# EAGLE board RPinstrumentationAmp1.1_v9 (EAGLE 9.7.0)
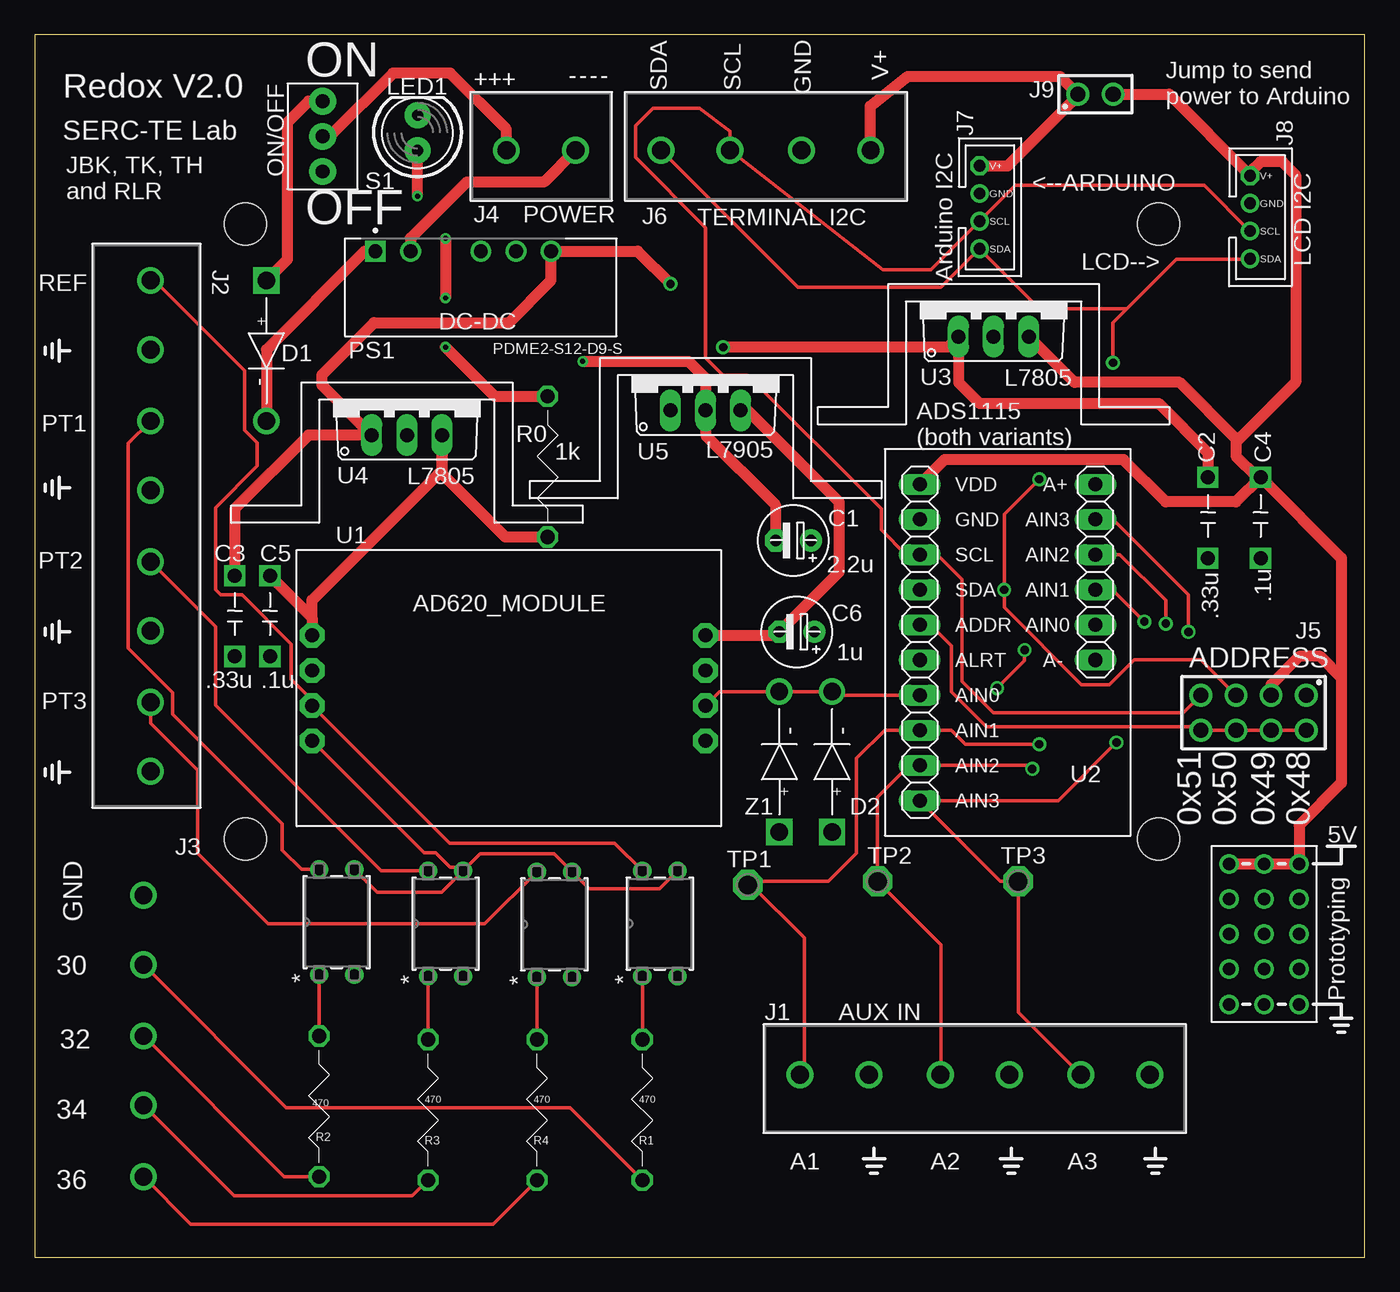
[diagram p0: board, top side]
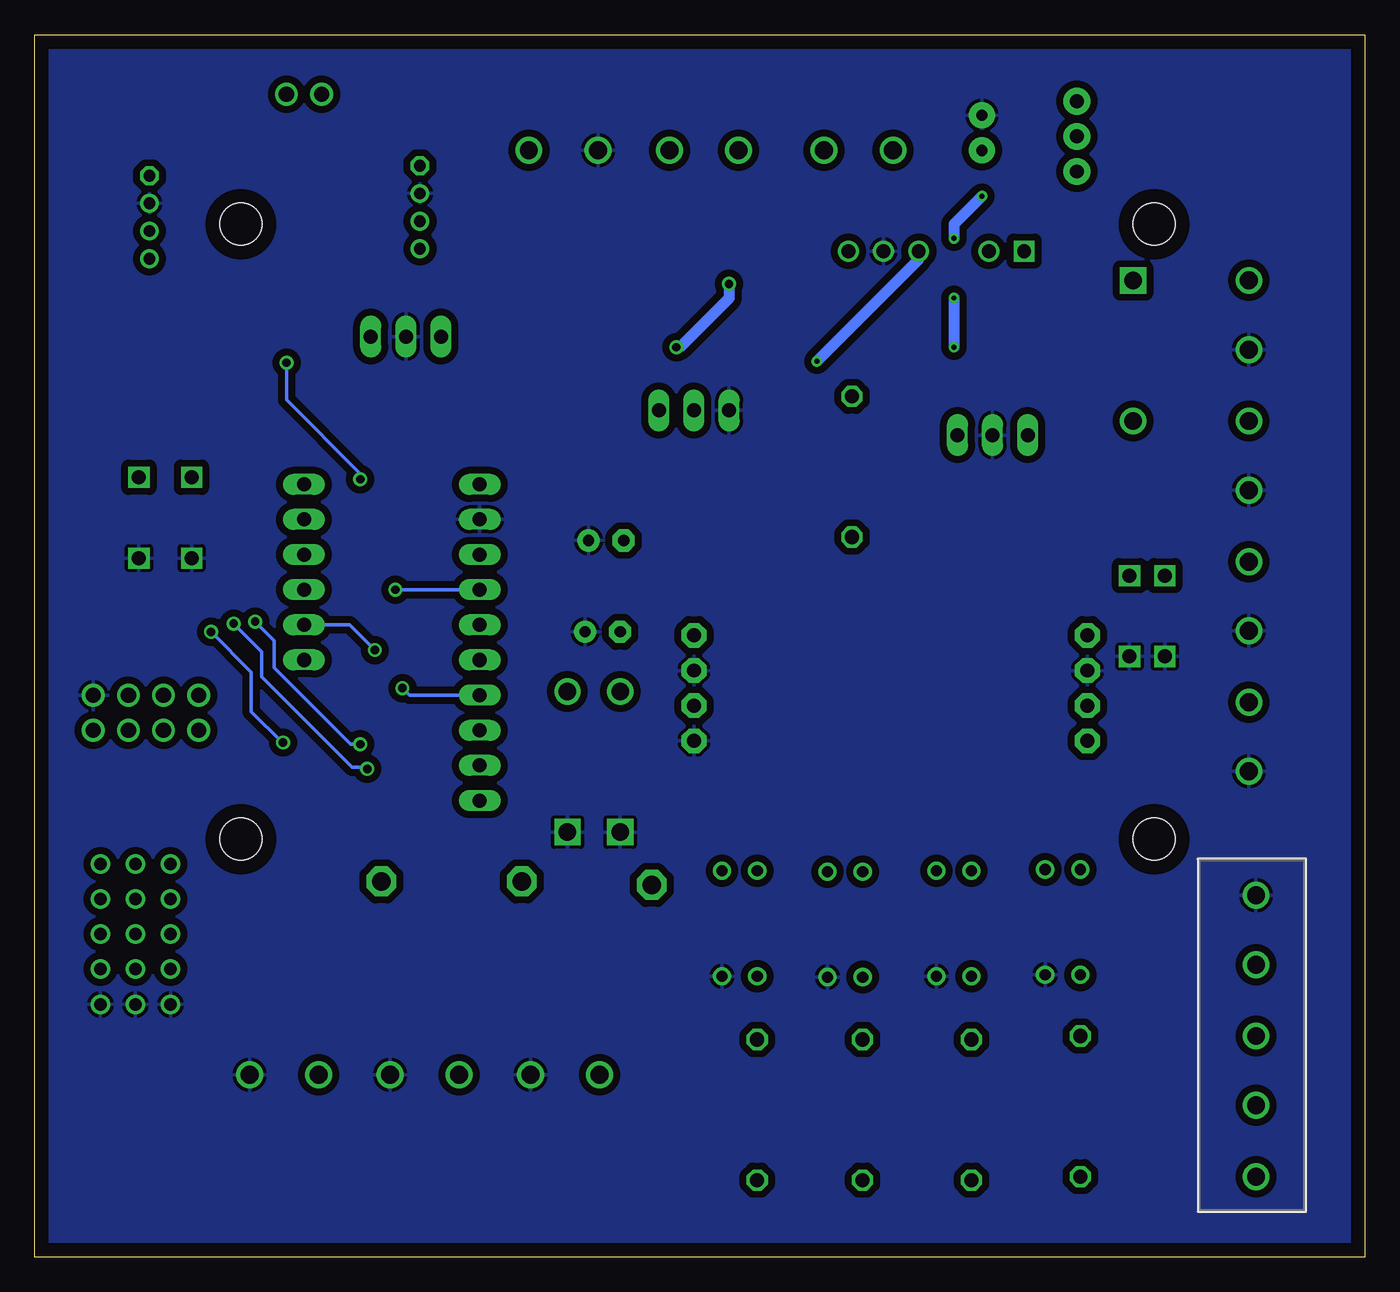
[diagram p1: board, bottom side, seen from below]

Size 96.19 x 88.38 mm. Coordinates in mm from the lower left corner, seen from the top.
Outline: 0,0 96.19,0 96.19,88.38 0,88.38 0,0
Copper layers (1*16): Top 0.035mm / dielectric 1.5mm / Bottom 0.035mm
Design rules "OSH": minimum track width 6mil, minimum drill 0.35mm, track to track 20mil, track to pad 20mil, pad to pad 20mil, via to via 20mil, smd to smd 6mil, copper to edge 40mil, drill to drill 6mil, minimum pad ring 10mil, minimum via ring 8mil, stop-mask expansion 4mil, vias tented up to drill 0mil, thermal gap 10mil
Holes 3.05 mm at 81.28,30.23 15.24,74.68 81.28,74.68 15.24,30.23

## Footprints (pad centres in the part's own frame; a part is rotated, then mirrored left to right if it is on the bottom)
E2,5-5 = drill 0.813 pad 1.6: + -1.27,0 | drill 0.813 pad 1.6 octagon: - 1.27,0
THCAPCERAMIC = drill 1.016 square: C1 -2.794,0; C2 3.048,0
DIODE-TH = drill 1.27 square: P$1 0,0 | drill 1.27: P$2 0,-10.16
6PIN_TERMINAL_5MM = drill 1.295 pad 1.803: 1 -12.7,0; 2 -7.696,0; 3 -2.54,0; 4 2.464,0; 5 7.62,0; 6 12.624,0
8PIN_TERMINAL_5MM = drill 1.295 pad 1.803: 1 0,0; 2 5.004,0; 3 10.16,0; 4 15.164,0; 5 20.32,0; 6 25.324,0; 7 30.48,0; 8 35.484,0
5PIN_TERMINAL_5MM = drill 1.295 pad 1.803: 1 -12.7,0; 2 -7.696,0; 3 -2.54,0; 4 2.464,0; 5 7.62,0
CONN2_710002_WRE = drill 1.295 pad 1.803: 1 0,0; 2 5.004,0
61300821121 = drill 1.1: 1 -3.81,-1.27; 2 -3.81,1.27; 3 -1.27,-1.27; 4 -1.27,1.27; 5 1.27,-1.27; 6 1.27,1.27; 7 3.81,-1.27; 8 3.81,1.27
4PIN_TERMINAL_5MM = drill 1.295 pad 1.803: 1 -7.62,0; 2 -2.616,0; 3 2.54,0; 4 7.544,0
JST_PH_4PIN = drill 0.85 octagon: P$1 -3,0 | drill 0.85: P$2 -1,0; P$3 1,0; P$4 3,0
61300211121 = drill 1.1: 1 -1.27,0; 2 1.27,0
A-DIP4_THD_OMR = drill 0.813 pad 1.321: 1 0,0; 2 0,-2.54; 3 7.62,-2.54; 4 7.62,0
LED-5MM-TH = drill 0.813 pad 1.88: A -1.27,0; K 1.27,0
PROTO_AREA_5X3 = drill 0.9: 1 0,0; 2 2.54,0; 3 5.08,0; 4 0,-2.54; 5 2.54,-2.54; 6 5.08,-2.54; 7 0,-5.08; 8 2.54,-5.08; 9 5.08,-5.08; 10 0,-7.62; 11 2.54,-7.62; 12 5.08,-7.62; 13 0,-10.16; 14 2.54,-10.16; 15 5.08,-10.16
CONV_PDME2-S12-D9-S = drill 1 square: 1 -7.615,2.625 | drill 1: 2 -5.075,2.625; 4 0.005,2.625; 5 2.545,2.625; 6 5.085,2.625
THRESISTOR = drill 1.016 octagon: R1 -5.08,0; R2 5.08,0
TT11_SPDT = drill 1 pad 1.93: P$1 -2.54,0; P$2 0,0; P$3 2.54,0
P1-13 = drill 1.321 pad 2.159 octagon: TP 0,0
AD620_MODULE = drill 1 pad 1.778 octagon: 1 -15.24,3.81; 2 -15.24,1.27; 3 -15.24,-1.27; 4 -15.24,-3.81; 5 13.208,-3.81; 6 13.208,-1.27; 7 13.208,1.27; 8 13.208,3.81
ADS1115_V2 = drill 1.016 long: 1 -11.43,0; 2 -8.89,0; 3 -6.35,0; 4 -3.81,0; 5 -1.27,0; 6 1.27,0; 7 3.81,0; 8 6.35,0; 9 8.89,0; 10 11.43,0; A0 -1.27,12.7; A1 -3.81,12.7; A2 -6.35,12.7; A3 -8.89,12.7; A+ -11.43,12.7; A- 1.27,12.7
TO220V = drill 1.016 long: 1 -2.54,-2.54; 2 0,-2.54; 3 2.54,-2.54

## Placement (x,y rotation side)
C1  2.2u  [E2,5-5]  54.86,51.82 180 top
C2  .33u  [THCAPCERAMIC]  84.84,53.59 270 top
C3  .33u  [THCAPCERAMIC]  14.48,46.48 270 top
C4  .1u  [THCAPCERAMIC]  88.65,53.59 270 top
C5  .1u  [THCAPCERAMIC]  17.02,46.48 270 top
C6  1u  [E2,5-5]  55.12,45.21 180 top
D1  1N5819  [DIODE-TH]  16.76,70.61 0 top
D2  1N5819  [DIODE-TH]  57.66,30.73 180 top
J1  AUX IN  [6PIN_TERMINAL_5MM]  68.03,13.21 0 top
J2  Probes In  [8PIN_TERMINAL_5MM]  8.38,70.61 270 top
J3  5PIN_TERMINAL_5MM  [5PIN_TERMINAL_5MM]  7.87,13.46 270 bottom
J4  POWER  [CONN2_710002_WRE]  39.12,80.01 180 top
J5  ADDRESS  [61300821121]  88.14,39.37 180 top
J6  TERMINAL I2C  [4PIN_TERMINAL_5MM]  52.83,80.01 180 top
J7  Arduino I2C  [JST_PH_4PIN]  68.33,75.9 270 top
J8  LCD I2C  [JST_PH_4PIN]  87.88,75.18 270 top
J9  5V->Arduino  [61300211121]  76.71,84.07 0 top
K1  G3VM-61A1A-DIP4_THD_OMR  [A-DIP4_THD_OMR]  43.94,20.32 90 top
K2  G3VM-61A1A-DIP4_THD_OMR  [A-DIP4_THD_OMR]  20.57,20.42 90 top
K3  G3VM-61A1A-DIP4_THD_OMR  [A-DIP4_THD_OMR]  28.45,20.32 90 top
K4  G3VM-61A1A-DIP4_THD_OMR  [A-DIP4_THD_OMR]  36.32,20.26 90 top
LED1  GREEN  [LED-5MM-TH]  27.69,81.28 90 top
PROTO1  PROTO_AREA_5X3  [PROTO_AREA_5X3]  86.36,28.45 0 top
PS1  PDME2-S12-D9-S  [CONV_PDME2-S12-D9-S]  32.26,70.1 0 top
R0  1k  [THRESISTOR]  37.08,57.15 270 top
R1  470  [THRESISTOR]  43.94,10.67 90 top
R2  470  [THRESISTOR]  20.57,10.92 90 top
R3  470  [THRESISTOR]  28.45,10.67 90 top
R4  470  [THRESISTOR]  36.32,10.67 90 top
S1  ON/OFF  [TT11_SPDT]  20.83,81.03 270 top
TP1  PTR1PAD1-13  [P1-13]  51.56,26.92 0 top
TP2  PTR1PAD1-13  [P1-13]  60.96,27.18 0 top
TP3  PTR1PAD1-13  [P1-13]  71.12,27.18 0 top
U1  AD620_MODULE  [AD620_MODULE]  35.31,41.15 0 top
U2  ADS1115_BOV2  [ADS1115_V2]  64.01,44.45 270 top
U3  L7805  [TO220V]  69.34,69.09 0 top
U4  L7805  [TO220V]  26.92,61.98 0 top
U5  L7905  [TO220V]  48.51,63.75 0 top
Z1  NZX5V1B  [DIODE-TH]  53.85,30.73 180 top

## Library data of the parts
C1-C6 D1 D2 J1-J3 J6-J9 LED1 PROTO1 R0 R1-R4 S1 U1-U5 Z1 = !Redox
J4 = !Redox; COPYRIGHT: Copyright (C) 2023 Ultra Librarian. All rights reserved.; MANUFACTURER_PART_NUMBER: 691137710002; MFR_NAME: Wurth Electronics
J5 = Wurth_Connectors_WR-PHD; DATASHEET-URL: https://www.we-online.com/catalog/datasheet/61300821121.pdf; GENDER: Pin Header; IR: 3A; MOUNT: THT; PACKAGING: Bag; PART-NUMBER: 61300821121; PINS: 8; PITCH: 2.54mm; ROWS: Dual; TYPE: Board Stacker
K1-K4 = G3VM-61A1D1_Library_SSR; COPYRIGHT: Copyright (C) 2024 Ultra Librarian. All rights reserved.; MANUFACTURER_PART_NUMBER: G3VM-61A1; MFR_NAME: Omron
PS1 = PDME2-S12-D9-S; MANUFACTURER: CUI Inc; MAXIMUM_PACKAGE_HEIGHT: 10.41 mm; PARTREV: 1.0; STANDARD: Manufacturer Recommendations
TP1-TP3 = testpad

## Nets
5V-A: C5.C1 R0.R2 U1.1 U4.3
5V-D: C4.C1 J5.3 J8.P$1 J9.2 PROTO1.1 PROTO1.2 PROTO1.3 U2.1 U3.3
-5V-A: C6.- U1.8 U5.3
A1: J1.1 TP1.TP U2.8 U2.A1
A2: J1.3 TP2.TP U2.9 U2.A2
A3: J1.5 TP3.TP U2.10 U2.A3
GND: C1.+ C2.C2 C3.C2 C4.C2 C5.C2 C6.+ D2.P$1 J1.2 J1.4 J1.6 J2.2 J2.4 J2.6 J2.8 J3.1 J5.1 J6.2 J7.P$2 J8.P$2 K1.2 K2.2 K3.2 K4.2 LED1.K PROTO1.13 PROTO1.14 PROTO1.15 PS1.5 U1.2 U1.5 U1.7 U2.2 U3.2 U4.2 U5.1 Z1.P$1
N$1: D2.P$2 U1.6 U2.7 U2.A0 Z1.P$2
N$2: C1.- PS1.4 U5.2
N$3: D1.P$2 PS1.1
N$4: J4.1 PS1.2
N$5: J2.7 K4.4
N$6: J2.5 K3.4
N$7: C2.C1 C3.C1 PS1.6 U3.1 U4.1
N$8: J4.2 S1.P$2
N$9: LED1.A R0.R1
N$10: D1.P$1 S1.P$1
N$11: J2.3 K2.4
N$12: K4.1 R4.R2
N$13: J5.2 J5.4 J5.6 J5.8 U2.5
N$14: J3.5 R4.R1
N$15: K3.1 R3.R2
N$16: J3.4 R3.R1
N$17: K2.1 R2.R2
N$18: J3.3 R2.R1
N$19: J3.2 R1.R1
N$20: K1.1 R1.R2
S+: K1.3 K2.3 K3.3 K4.3 U1.4
S-: J2.1 K1.4 U1.3
SCL: J5.7 J6.3 J7.P$3 J8.P$3 U2.3
SDA: J5.5 J6.4 J7.P$4 J8.P$4 U2.4
V+: J6.1 J7.P$1 J9.1

## Tracks (layer width: path | path; a pad name or v marks a point on that pad's centre or on a via)
5V-A
  Top 0.813: 20.07,46.23 C5.C1 | 20.07,46.23 20.07,47.5 29.46,56.9 U4.3 29.46,56.64 34.04,52.07 R0.R2 | 20.07,46.23 U1.1
5V-D
  Top 0.813: U2.1 65.79,57.66 78.74,57.66 81.79,54.61 86.87,54.61 C4.C1 | J9.2 82.04,84.07 87.88,78.23 J8.P$1 87.88,78.44 88.65,79.2 90.22,79.2 91.19,78.23 91.19,63.25 86.87,58.93 | U3.3 75.18,63.25 82.8,63.25 86.87,59.18 86.87,58.93 | 86.87,58.93 86.87,57.91 88.39,56.39 C4.C1 | J5.3 89.41,41.4 91.44,43.43 92.96,43.43 94.49,41.91 | 94.49,41.91 94.49,34.29 91.44,31.24 PROTO1.3 PROTO1.2 PROTO1.1 | C4.C1 94.49,50.55 94.49,41.91
-5V-A
  Top 0.813: U5.3 51.56,61.21 58.17,54.61 58.17,49.53 C6.- 53.59,44.96 U1.8
A1  (via drill 0.6)
  Top 0.254: v72.64,37.08 67.31,37.08 66.29,38.1 U2.8 61.47,38.1 59.44,36.07 59.44,29.21 57.4,27.18 51.56,27.18 51.31,26.92 TP1.TP 51.82,26.92 55.65,23.09 55.65,13.53 J1.1 | v80.25,45.96 77.95,48.26 U2.A1
  Bottom 0.254: v72.64,37.08 73.35,37.08 78.87,42.6 78.87,44.58 v80.25,45.96
A2  (via drill 0.6)
  Top 0.254: v72.14,35.31 71.88,35.56 U2.9 63.25,35.56 60.96,33.27 TP2.TP 65.53,22.61 65.53,13.21 J1.3 | v81.79,45.81 81.79,47.5 78.49,50.8 U2.A2
  Bottom 0.254: v72.14,35.31 72.27,35.44 73.22,35.44 79.76,41.97 79.76,43.77 v81.79,45.81
A3  (via drill 0.6)
  Top 0.254: v78.23,37.22 74.04,33.02 U2.10 69.85,27.18 TP3.TP 71.12,17.74 J1.5 | v83.43,45.21 83.43,47.88 77.98,53.34 U2.A3
  Bottom 0.254: v78.23,37.22 78.3,37.22 80.52,39.43 80.52,42.3 v83.43,45.21
GND
  pour Bottom: 0.51,0.76 95.76,0.76 95.76,87.88 0.51,87.88
N$1  (via drill 0.6)
  Top 0.254: U1.6 49.53,40.89 Z1.P$2 D2.P$2 57.91,40.64 U2.7 | v69.6,41.15 71.58,43.14 v71.58,43.9
  Bottom 0.254: U2.7 69.09,40.64 v69.6,41.15 | v71.58,43.9 73.41,45.72 U2.A0
N$2  (via drill 0.35)
  Top 0.813: C1.- 53.59,54.36 48.51,59.44 U5.2 48.51,63.55 47.3,64.77 v39.62,64.77
  Bottom 0.813: PS1.4 32.26,72.14 v39.62,64.77
N$3
  Top 0.813: PS1.1 23.88,72.73 16.76,65.61 D1.P$2
N$4
  Top 0.813: J4.1 36.83,77.72 31.24,77.72 27.18,73.66 PS1.2
N$5
  Top 0.254: K4.4 32.55,24.1 22.43,24.1 16.87,24.1 11.78,29.2 11.78,35.22 8.38,38.62 J2.7
N$6
  Top 0.254: J2.5 13.08,45.59 13.08,39.91 25.05,27.94 K3.4
N$7  (via drill 0.6)
  Top 0.813: C3.C1 14.48,54.1 19.81,59.44 U4.1 20.78,63.04 20.78,63.79 24.55,67.56 34.29,67.56 37.34,70.62 PS1.6 43.6,72.73 v45.97,70.36 | v49.78,65.79 66.04,65.79 U3.1 66.8,63.25 68.33,61.72 81.28,61.72 84.84,58.17 C2.C1
  Bottom 0.813: v49.78,65.79 49.53,65.79 45.97,69.34 v45.97,70.36
N$8
  Top 0.813: S1.P$2 21.34,81.03 25.91,85.6 30.05,85.6 34.11,81.53 J4.2
N$9  (via drill 0.35)
  Top 0.813: v27.69,76.71 LED1.A | v29.72,73.66 v29.72,69.34 | v29.72,65.79 33.27,62.23 R0.R1
  Bottom 0.813: v27.69,76.71 29.72,74.68 v29.72,73.66 | v29.72,69.34 v29.72,65.79
N$10
  Top 0.813: D1.P$1 18.29,72.14 18.29,82.04 19.81,83.57 S1.P$1
N$11
  Top 0.254: J2.3 6.78,58.84 6.78,44.01 9.99,40.8 9.99,39.25 17.91,31.33 17.91,29.43 19.29,28.04 K2.4
N$12
  Top 0.254: K4.1 R4.R2
N$13
  Top 0.254: J5.2 J5.4 J5.6 J5.8 84.07,38.35 68.83,38.35 66.29,40.89 66.29,44.2 64.77,45.72 U2.5
N$14
  Top 0.254: R4.R1 33.15,2.41 11.3,2.41 J3.5
N$15
  Top 0.254: K3.1 R3.R2
N$16
  Top 0.254: R3.R1 27.31,4.44 14.43,4.44 J3.4
N$17
  Top 0.254: R2.R2 K2.1
N$18
  Top 0.254: R2.R1 18.03,5.84 J3.3
N$19
  Top 0.254: J3.2 18.21,10.83 38.7,10.83 R1.R1
N$20
  Top 0.254: K1.1 R1.R2
S+
  Top 0.254: K2.3 24.77,26.39 29.44,26.39 K3.3 31.24,28.19 | K1.3 45.19,26.64 40.09,26.64 K4.3 37.57,29.17 32.22,29.17 31.24,28.19 | U1.4 28.17,29.23 28.99,29.23 30.03,28.19 31.24,28.19
S-
  Top 0.254: J2.1 8.64,70.61 15.18,64.07 15.18,59.79 16.11,58.87 16.11,57.2 13.08,54.18 13.08,48.25 13.45,47.88 15,47.88 18.54,44.33 18.54,41.79 20.07,40.26 U1.3 30.01,29.93 41.95,29.93 K1.4
SCL
  Top 0.254: J5.7 83.06,39.37 69.34,39.37 67.06,41.66 67.06,49.02 65.28,50.8 U2.3 62.99,50.8 61.21,52.58 61.21,54.1 51.56,63.75 49.78,63.75 48.51,65.02 48.51,74.42 43.43,79.5 43.43,81.79 44.7,83.06 48.08,83.06 50.29,81.39 J6.3 61.33,71.37 64.8,71.37 J7.P$3 70.91,77.49 84.58,77.49 J8.P$3
SDA  (via drill 0.6)
  Top 0.254: J6.4 55.19,70.1 65.53,70.1 J7.P$4 72.64,68.58 78.99,68.58 | J5.5 84.33,43.18 79.5,43.18 77.72,41.4 75.69,41.4 70.1,46.99 v70.1,48.26 70.1,53.7 v72.64,56.24 | J8.P$4 87.83,72.14 82.55,72.14 78.99,68.58 | v77.98,64.66 77.98,67.56 78.99,68.58
  Bottom 0.254: v70.1,48.26 U2.4 | v77.98,64.66 77.98,61.98 72.64,56.64 v72.64,56.24
V+
  Top 0.813: J6.1 60.45,83.21 60.43,83.21 63.11,85.34 74.17,85.34 J9.1 75.44,83.98 70.36,78.9 J7.P$1

## Text on the board
tPlace: ON | - | - | - | - | V+ | Redox V2.0 | + | + | + | SDA | SCL | GND | Jump to send / power to Arduino | SERC-TE Lab | JBK, TK, TH / and RLR | OFF | REF | <--ARDUINO / / / LCD--> | DC-DC | PT1 | ADS1115 / (both variants) | PT2 | PT3 | 0x51 | 0x50 | 0x49 | 0x48 | 5V | GND | 30 | Prototyping | 32 | 34 | 36 | A1 | A2 | A3